# EAGLE board CT_schematic (EAGLE 7.6.0)

Size 100 x 80 mm. Coordinates in mm from the lower left corner, seen from the top.
Outline: 0,0 100,0 100,80 0,80 0,0
Copper layers (1*16): Top 0.035mm / dielectric 1.5mm / Bottom 0.035mm
Design rules "default": minimum track width 10mil, minimum drill 24mil, track to track 8mil, track to pad 8mil, pad to pad 8mil, via to via 8mil, smd to smd 8mil, copper to edge 40mil, drill to drill 8mil, minimum pad ring 10mil, minimum via ring 8mil, stop-mask expansion 4mil, vias tented up to drill 0mil, thermal gap 10mil

## Footprints (pad centres in the part's own frame; a part is rotated, then mirrored left to right if it is on the bottom)
C0603 = smd 0.8 x 0.8: 1 -0.762,0; 2 0.762,0
C0402 = smd 0.5 x 0.5: 1 -0.508,0; 2 0.508,0
C0805 = smd 1.2 x 1.3: 1 -1.016,0; 2 1.016,0
C1206 = smd 1.3 x 1.6: 1 -1.524,0; 2 1.524,0
L0603 = smd 0.8 x 0.8: 1 -0.762,0; 2 0.762,0
L1210 = smd 1.2 x 2.5: 1 -1.524,0; 2 1.524,0
L0805 = smd 1.2 x 1.3: 1 -1.016,0; 2 1.016,0
R0603 = smd 0.8 x 0.8: 1 -0.762,0; 2 0.762,0
LQFP48 = smd 0.3 x 1.2: 1 -2.75,-4.25; 2 -2.25,-4.25; 3 -1.75,-4.25; 4 -1.25,-4.25; 5 -0.75,-4.25; 6 -0.25,-4.25; 7 0.25,-4.25; 8 0.75,-4.25; 9 1.25,-4.25; 10 1.75,-4.25; 11 2.25,-4.25; 12 2.75,-4.25; 25 2.75,4.25; 26 2.25,4.25; 27 1.75,4.25; 28 1.25,4.25; 29 0.75,4.25; 30 0.25,4.25; 31 -0.25,4.25; 32 -0.75,4.25; 33 -1.25,4.25; 34 -1.75,4.25; 35 -2.25,4.25; 36 -2.75,4.25 | smd 1.2 x 0.3: 13 4.25,-2.75; 14 4.25,-2.25; 15 4.25,-1.75; 16 4.25,-1.25; 17 4.25,-0.75; 18 4.25,-0.25; 19 4.25,0.25; 20 4.25,0.75; 21 4.25,1.25; 22 4.25,1.75; 23 4.25,2.25; 24 4.25,2.75; 37 -4.25,2.75; 38 -4.25,2.25; 39 -4.25,1.75; 40 -4.25,1.25; 41 -4.25,0.75; 42 -4.25,0.25; 43 -4.25,-0.25; 44 -4.25,-0.75; 45 -4.25,-1.25; 46 -4.25,-1.75; 47 -4.25,-2.25; 48 -4.25,-2.75
TST-110-05-T-D-RA = drill 1 pad 1.7 square: 1 0,0 | drill 1 pad 1.7: 2 0,2.54; 3 2.54,0; 4 2.54,2.54; 5 5.08,0; 6 5.08,2.54; 7 7.62,0; 8 7.62,2.54; 9 10.16,0; 10 10.16,2.54; 11 12.7,0; 12 12.7,2.54; 13 15.24,0; 14 15.24,2.54; 15 17.78,0; 16 17.78,2.54; 17 20.32,0; 18 20.32,2.54; 19 22.86,0; 20 22.86,2.54
SSOP-20 = smd 1.651 x 0.432: 1 -3.48,2.925; 2 -3.48,2.275; 3 -3.48,1.625; 4 -3.48,0.975; 5 -3.48,0.325; 6 -3.48,-0.325; 7 -3.48,-0.975; 8 -3.48,-1.625; 9 -3.48,-2.275; 10 -3.48,-2.925; 11 3.48,-2.925; 12 3.48,-2.275; 13 3.48,-1.625; 14 3.48,-0.975; 15 3.48,-0.325; 16 3.48,0.325; 17 3.48,0.975; 18 3.48,1.625; 19 3.48,2.275; 20 3.48,2.925
HTSS-105-01-G-D = drill 1 pad 1.8 square: 1 0,0 | drill 1 pad 1.8: 2 0,2.54; 3 2.54,0; 4 2.54,2.54; 5 5.08,0; 6 5.08,2.54; 7 7.62,0; 8 7.62,2.54; 9 10.16,0; 10 10.16,2.54
ASEK = smd 1.4 x 1: 1 -1.1,-0.8; 2 1.1,-0.8; 3 1.1,0.8; 4 -1.1,0.8
ASFL1 = smd 1.7 x 1.5: 1 -1.27,-1.1; 2 1.27,-1.1; 3 1.27,1.1; 4 -1.27,1.1
TSOT-23-5 = smd 1.3 x 0.62: 1 -1.31,0.95; 2 -1.31,0; 3 -1.31,-0.95; 4 1.31,-0.95; 5 1.31,0.95
DFN8_2X3MC = smd 0.813 x 0.305: 1 -1.398,0.75; 2 -1.398,0.25; 3 -1.398,-0.25; 4 -1.398,-0.75; 5 1.398,-0.75; 6 1.398,-0.25; 7 1.398,0.25; 8 1.398,0.75 | smd 1.753 x 1.549: 9 0,0
JST-2-SMD = smd 1 x 4.6: 1 -1,-3.7; 2 1,-3.7 | smd 1.6 x 3.4: NC1 -3.4,1.5; NC2 3.4,1.5
FCI_10118193-0001LF = smd 0.4 x 1.35: 1 -1.3,2.675; 2 -0.65,2.675; 3 0,2.675; 4 0.65,2.675; 5 1.3,2.675 | smd 1.6 x 1.4: 6 -3.2,2.45; 7 3.2,2.45 | smd 1.9 x 1.9: 8 -1.2,0; 9 1.2,0 | hole 0.5: -3.3,0; 3.3,0
SON-6 = smd 0.55 x 0.3: 1 -0.355,0.5 | smd 0.52 x 0.3: 2 -0.37,0; 3 -0.37,-0.5; 4 0.37,-0.5; 5 0.37,0; 6 0.37,0.5
SW_4-1437565-2 = smd 1.4 x 2.1: 1 -2.23,4.55; 2 -2.23,-4.55; 3 2.23,4.55; 4 2.23,-4.55
LGM67K-G1J2-24-Z = smd 0.8 x 1.4: A -2,0; C 0,0
NC7SZ125M5X = smd 1.3 x 0.7: 1 -1.3,0.95; 2 -1.3,0; 3 -1.3,-0.95; 4 1.3,-0.95; 5 1.3,0.95
DUMMY_PACKAGE_139 = drill 0.3: 1 0,-1; 2 1.5,-1; 3 3,-1

## Placement (x,y rotation side)
C1  1e-06  [C0603]  -48.26,53.34 0 top  (outside the outline)
C2  1e-07  [C0603]  -52.07,53.34 0 top  (outside the outline)
C3  1e-07  [C0603]  -55.88,53.34 0 top  (outside the outline)
C4  1e-07  [C0603]  -59.69,53.34 0 top  (outside the outline)
C5  1e-07  [C0603]  -63.5,53.34 0 top  (outside the outline)
C6  4.7e-06  [C0603]  -44.45,53.34 0 top  (outside the outline)
C7  1e-08  [C0603]  -15.24,58.42 0 top  (outside the outline)
C8  1e-08  [C0603]  -19.05,58.42 0 top  (outside the outline)
C9  1e-06  [C0603]  -22.86,58.42 0 top  (outside the outline)
C10  1e-07  [C0402]  -60.96,58.42 0 top  (outside the outline)
C11  1e-07  [C0402]  -15.24,63.5 0 top  (outside the outline)
C12  1e-06  [C0603]  -26.67,58.42 0 top  (outside the outline)
C13  1e-06  [C0603]  -30.48,58.42 0 top  (outside the outline)
C14  1e-06  [C0603]  -34.29,58.42 0 top  (outside the outline)
C15  4.7e-06  [C0805]  -27.94,41.91 0 top  (outside the outline)
C16  1e-08  [C0402]  -19.05,63.5 0 top  (outside the outline)
C17  1e-08  [C0402]  -22.86,63.5 0 top  (outside the outline)
C18  1e-05  [C0805]  -33.02,41.91 0 top  (outside the outline)
C19  1e-05  [C0805]  -38.1,41.91 0 top  (outside the outline)
C20  1e-07  [C0402]  -26.67,63.5 0 top  (outside the outline)
C21  1e-05  [C1206]  -54.61,35.56 0 top  (outside the outline)
C22  1e-05  [C1206]  -60.96,35.56 0 top  (outside the outline)
C23  1e-08  [C0402]  -30.48,63.5 0 top  (outside the outline)
C24  1e-08  [C0402]  -34.29,63.5 0 top  (outside the outline)
F1  240.0  [L0603]  -38.1,58.42 0 top  (outside the outline)
I1  1.5e-05  [L1210]  -48.26,35.56 0 top  (outside the outline)
I2  2.2e-06  [L0805]  -43.18,41.91 0 top  (outside the outline)
R1  10000.0  [R0603]  -40.64,48.26 0 top  (outside the outline)
R2  1000.0  [R0603]  -41.91,58.42 0 top  (outside the outline)
R3  1600.5  [R0603]  -45.72,58.42 0 top  (outside the outline)
R4  4700.0  [R0603]  -49.53,58.42 0 top  (outside the outline)
R5  10000.0  [R0603]  -45.72,48.26 0 top  (outside the outline)
R6  10000.0  [R0603]  -50.8,48.26 0 top  (outside the outline)
R7  10000.0  [R0603]  -55.88,48.26 0 top  (outside the outline)
R8  10000.0  [R0603]  -60.96,48.26 0 top  (outside the outline)
R9  10000.0  [R0603]  -15.24,53.34 0 top  (outside the outline)
R10  10000.0  [R0603]  -20.32,53.34 0 top  (outside the outline)
R11  10000.0  [R0603]  -25.4,53.34 0 top  (outside the outline)
R12  100000.0  [R0603]  -60.96,41.91 0 top  (outside the outline)
R13  100000.0  [R0603]  -15.24,48.26 0 top  (outside the outline)
R14  100000.0  [R0603]  -20.32,48.26 0 top  (outside the outline)
R15  220000.0  [R0603]  -25.4,48.26 0 top  (outside the outline)
R16  1000000.0  [R0603]  -55.88,41.91 0 top  (outside the outline)
R17  10000.0  [R0603]  -30.48,53.34 0 top  (outside the outline)
R18  10000.0  [R0603]  -35.56,53.34 0 top  (outside the outline)
R19  9100.0  [R0603]  -53.34,58.42 0 top  (outside the outline)
R20  680000.0  [R0603]  -30.48,48.26 0 top  (outside the outline)
R21  120000.0  [R0603]  -35.56,48.26 0 top  (outside the outline)
R22  2000.0  [R0603]  -57.15,58.42 0 top  (outside the outline)
R23  10000.0  [R0603]  -40.64,53.34 0 top  (outside the outline)
U1  stm32f100c6t7  [LQFP48]  -57.15,5.08 0 top  (outside the outline)
U2  TST-110-05-T-D-RA  [TST-110-05-T-D-RA]  -58.42,24.13 0 top  (outside the outline)
U3  MAX3218EAP+T  [SSOP-20]  -36.83,16.51 0 top  (outside the outline)
U4  HTSS-105-01-G-D  [HTSS-105-01-G-D]  -27.94,16.51 0 top  (outside the outline)
U5  ASEK-32.768KHz-ECST  [ASEK]  -29.21,35.56 0 top  (outside the outline)
U6  ASFL1-25MHZ-NCS  [ASFL1]  -55.88,16.51 0 top  (outside the outline)
U7  ltc3406es5  [TSOT-23-5]  -48.26,41.91 0 top  (outside the outline)
U8  MCP73831T-2ACI/MC  [DFN8_2X3MC]  -49.53,62.23 0 top  (outside the outline)
U9  S2B-PH-SM4-TB(LF)(SN)  [JST-2-SMD]  -41.91,6.35 0 top  (outside the outline)
U10  10118193-0001LF  [FCI_10118193-0001LF]  -19.05,26.67 0 top  (outside the outline)
U11  TPS3895ADRYR  [SON-6]  -43.18,62.23 0 top  (outside the outline)
U12  4-1437565-2  [SW_4-1437565-2]  -27.94,6.35 0 top  (outside the outline)
U13  Q65110A2395  [LGM67K-G1J2-24-Z]  -36.83,35.56 0 top  (outside the outline)
U14  nc7sz125m5x  [NC7SZ125M5X]  -15.24,41.91 0 top  (outside the outline)
U15  nc7sz125m5x  [NC7SZ125M5X]  -21.59,41.91 0 top  (outside the outline)
U16  Dummy  [DUMMY_PACKAGE_139]  -40.64,63.5 0 top  (outside the outline)

## Library data of the parts
C1-C24 F1 I1 I2 R1-R23 U1-U16 = circuit_tree

## Nets
CLK_U1_3: U1.3 U5.3
CLK_U1_5: U1.5 U6.3
GND: C1.2 C2.2 C3.2 C4.2 C5.2 C6.2 C7.2 C8.2 C9.2 C10.2 C11.2 C12.2 C13.2 C14.2 C16.2 C17.2 C18.2 C19.1 C19.2 C20.2 C21.2 C22.2 C23.2 C24.2 R2.2 R5.2 R11.2 R15.2 R19.2 R21.2 R22.2 U1.8 U1.23 U1.35 U1.47 U2.4 U2.6 U2.8 U2.10 U2.12 U2.14 U2.16 U2.18 U2.20 U3.5 U3.17 U3.20 U4.9 U5.2 U6.2 U7.2 U8.6 U8.9 U9.2 U10.5 U10.6 U10.7 U10.8 U10.9 U11.2 U13.C U14.2 U14.3 U15.1 U15.3 U16.1
INPUT_USBPOWER_5V: C21.1 R23.2 U8.1 U8.2 U10.1
NET_U1_7: R4.1 U1.7 U15.4
NET_U1_9: C7.1 C8.1 C9.1 F1.1 U1.9
NET_U1_44: R5.1 U1.44
NET_U1_45: R3.1 U1.45 U13.A
NET_U1_46: R1.1 U1.46 U12.3 U12.4
NET_U2_3: R6.1 U2.3
NET_U2_7: R8.1 U2.7
NET_U2_9: R9.1 U2.9
NET_U2_19: R11.1 U2.19
NET_U3_1: I1.1 U3.1
NET_U3_2: R12.1 U3.2
NET_U3_3: R13.1 U3.3
NET_U3_4: R14.1 U3.4
NET_U3_15: C14.1 U3.15
NET_U3_16: C15.2 U3.16
NET_U3_18: C15.1 U3.18
NET_U3_19: C13.1 U3.19
NET_U4_3: U3.12 U4.3
NET_U4_4: U3.11 U4.4
NET_U4_5: U3.14 U4.5
NET_U4_6: U3.13 U4.6
NET_U7_1: U7.1
NET_U7_3: I2.1 U7.3
NET_U7_5: R15.1 R16.1 U7.5
NET_U7_ATNET_3: I2.2 R16.2
NET_U8_5: R23.1 U8.5
NET_U8_8: R22.1 U8.8
NET_U11_1: R18.1 R19.1 U11.1
NET_U11_3: R20.2 R21.1 U11.3
NET_U11_4: R17.1 U11.4 U14.4 U15.2
NET_U12_1: R2.1 U12.1 U12.2
PROC_SYS_JTDI: R7.1 U1.38 U2.5
PROC_SYS_JTDO_TRACESWO: U1.39 U2.13
PROC_TIM1_CH1N: U1.17 U16.3
PROC_TIM1_CH3N: U1.19 U16.2
PROC_USART1_CTS: U1.32 U3.8
PROC_USART1_RTS: U1.33 U3.10
PROC_USART1_RX: U1.31 U3.9
PROC_USART1_TX: U1.30 U3.7
RST_OUT_U2_SRESET_B: R10.1 U2.15 U14.1
VCC_S1_3V7: C18.1 C22.1 U7.4 U8.3 U8.4 U9.1
VCC_TIER1_3V3: C1.1 C2.1 C3.1 C4.1 C5.1 C6.1 C10.1 C11.1 C12.1 C16.1 C17.1 C19.2 C20.1 C23.1 C24.1 F1.2 I1.2 I2.2 R1.2 R3.2 R4.2 R6.2 R7.2 R8.2 R9.2 R10.2 R12.2 R13.2 R14.2 R16.2 R17.2 R18.2 R20.1 U1.1 U1.24 U1.36 U1.48 U2.1 U2.2 U3.6 U5.4 U6.4 U11.6 U14.5 U15.5

## Tracks (layer width: path | path; a pad name or v marks a point on that pad's centre or on a via)
CLK_U1_3  (1 unrouted)
CLK_U1_5  (1 unrouted)
GND  (65 unrouted)
INPUT_USBPOWER_5V  (4 unrouted)
NET_U1_7  (2 unrouted)
NET_U1_9  (4 unrouted)
NET_U1_44  (1 unrouted)
NET_U1_45  (2 unrouted)
NET_U1_46  (3 unrouted)
NET_U2_3  (1 unrouted)
NET_U2_7  (1 unrouted)
NET_U2_9  (1 unrouted)
NET_U2_19  (1 unrouted)
NET_U3_1  (1 unrouted)
NET_U3_2  (1 unrouted)
NET_U3_3  (1 unrouted)
NET_U3_4  (1 unrouted)
NET_U3_15  (1 unrouted)
NET_U3_16  (1 unrouted)
NET_U3_18  (1 unrouted)
NET_U3_19  (1 unrouted)
NET_U4_3  (1 unrouted)
NET_U4_4  (1 unrouted)
NET_U4_5  (1 unrouted)
NET_U4_6  (1 unrouted)
NET_U7_3  (1 unrouted)
NET_U7_5  (2 unrouted)
NET_U7_ATNET_3  (1 unrouted)
NET_U8_5  (1 unrouted)
NET_U8_8  (1 unrouted)
NET_U11_1  (2 unrouted)
NET_U11_3  (2 unrouted)
NET_U11_4  (3 unrouted)
NET_U12_1  (2 unrouted)
PROC_SYS_JTDI  (2 unrouted)
PROC_SYS_JTDO_TRACESWO  (1 unrouted)
PROC_TIM1_CH1N  (1 unrouted)
PROC_TIM1_CH3N  (1 unrouted)
PROC_USART1_CTS  (1 unrouted)
PROC_USART1_RTS  (1 unrouted)
PROC_USART1_RX  (1 unrouted)
PROC_USART1_TX  (1 unrouted)
RST_OUT_U2_SRESET_B  (2 unrouted)
VCC_S1_3V7  (5 unrouted)
VCC_TIER1_3V3  (44 unrouted)